# Altium PCB 如意硬件系统模块0831.PcbDoc (part 3 of 3)
Units mm, origin at the board's own origin, x right, y up, seen from the top; angles counter-clockwise.
Board outline 160 x 114.8 mm, 2 copper layers (Top Layer, Bottom Layer); 173 components, 141 nets, 673 pads, 206 vias.
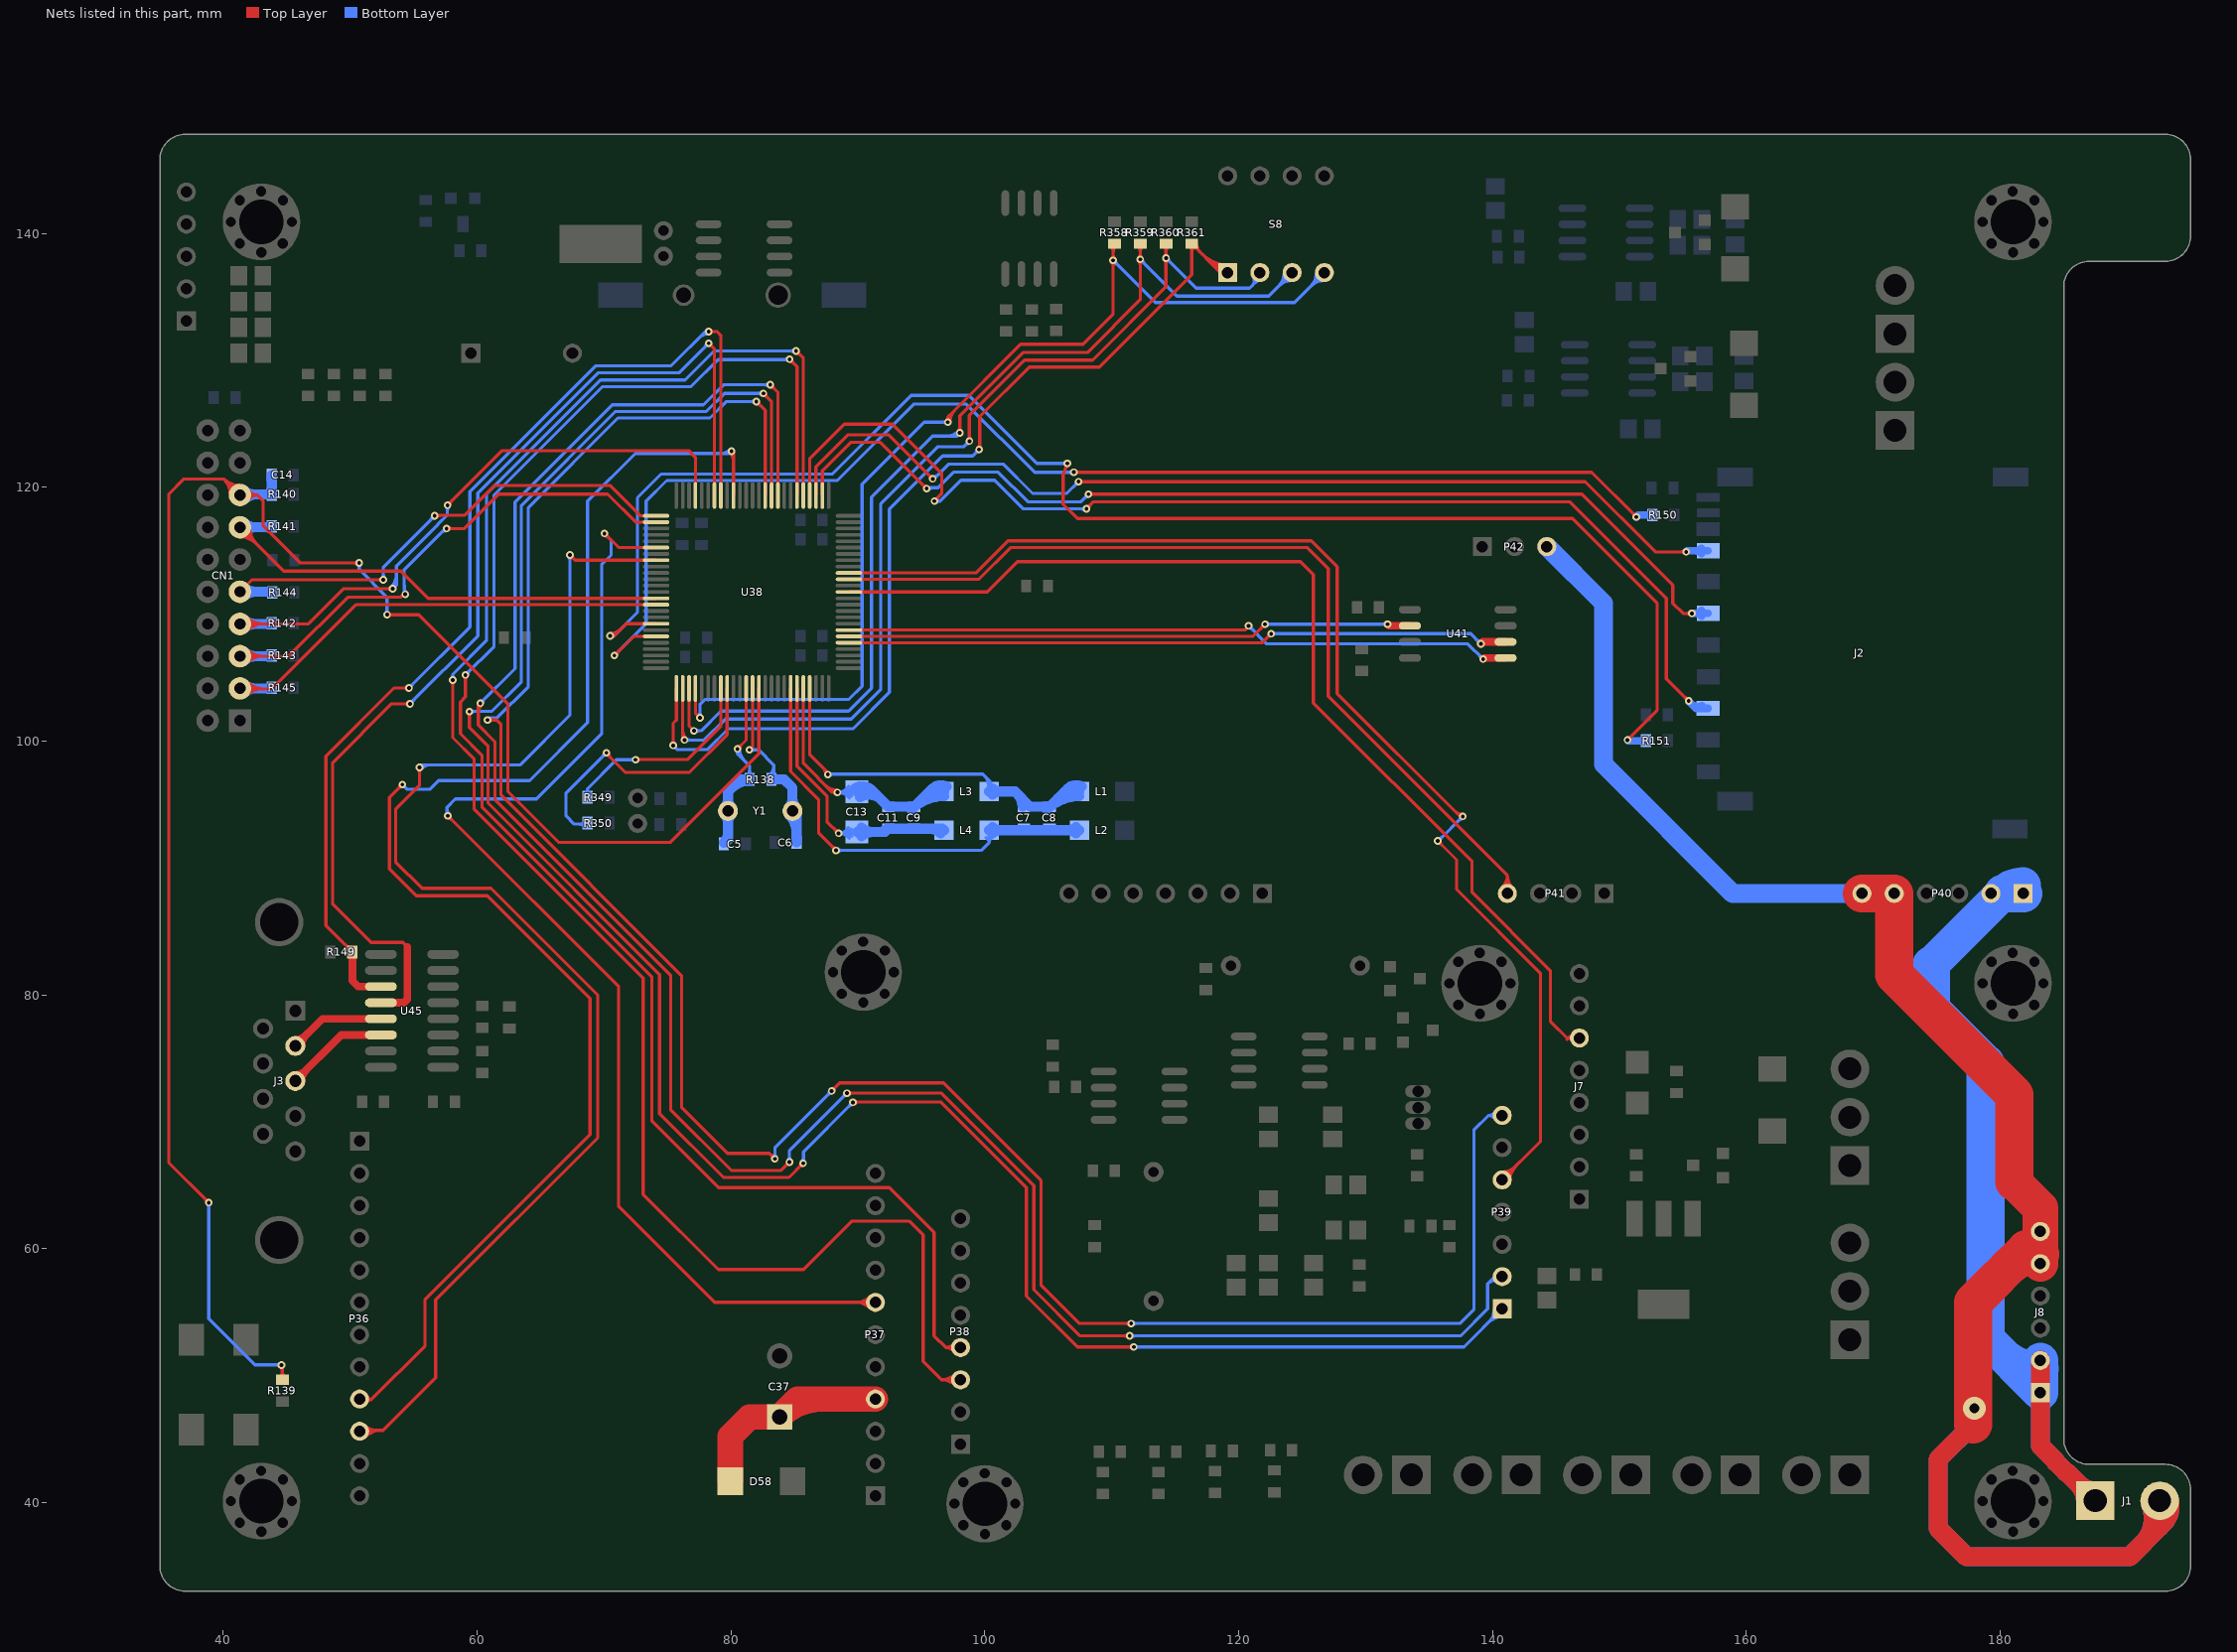
[diagram p3: the nets of this part, all layers, seen from the top]

## Via types
v1: diameter 0.6, hole 0.3, Top Layer to Bottom Layer, 151 vias
v2: diameter 0.8, hole 0.4, Top Layer to Bottom Layer, 35 vias
v3: diameter 1.27, hole 0.711, Top Layer to Bottom Layer, 15 vias
v4: diameter 1.8, hole 0.9, Top Layer to Bottom Layer, 2 vias
v5: diameter 1.8, hole 0.8, Top Layer to Bottom Layer, 1 vias
v6: diameter 1.66, hole 1.66, Top Layer to Bottom Layer, 1 vias
v7: diameter 1.18, hole 1.18, Top Layer to Bottom Layer, 1 vias

## Nets (pads, with @x,y where several pads share a name; then routed paths per layer and width w, separated by ;. In a path a pad name is that pad's centre, name@x,y a point inside that pad or via, vN(x,y) a via of type N, cw(c..) or ccw(c..) an arc to the next point about the centre after c; other vN are vias at no path point) (continued)
NRELOAD: P39.2 U38.59 | length 183.3
  Top Layer w0.254: 60.096,102.186 cw(c61.034,102.186) v1@60.371,102.849 ; v1(60.249,102.972) 60.096,102.819 60.096,101.244 61.392,99.949 61.392,95.402 75.235,81.559 75.235,70.942 80.018,66.159 83.934,66.159 v1(84.6,66.825) ; v1@83.083,127.894 cw(c83.083,127.476) 83.379,127.771 cw(c83.674,128.067) v1@83.256,128.067 ; v1(83.083,128.067) 83.692,127.458 U38.59@83.692,119.34 ; v1@84.427,66.825 cw(c84.009,66.825) 84.305,66.53 cw(c84.6,66.234) v1@84.6,66.652 ; v1(89.125,72.25) 96.584,72.25 103.861,64.973 103.861,56.769 107.505,53.125 v1(111.4,53.125) ; v1@89.247,72.128 cw(c89.543,71.832) 89.543,72.25 cw(c89.543,72.668) v1@89.247,72.372 ; v1@111.278,53.003 ccw(c110.982,52.707) 110.982,53.125 ccw(c110.982,53.543) v1@111.278,53.247
  Bottom Layer w0.254: v1(60.249,102.972) 62.975,105.698 62.975,118.83 70.637,126.492 77.826,126.492 79.4,128.067 v1(83.083,128.067) ; v1@60.249,103.145 ccw(c60.249,103.562) 60.544,103.267 ccw(c60.839,102.972) v1@60.422,102.972 ; v1@82.961,127.944 ccw(c82.666,127.649) 82.666,128.067 ccw(c82.666,128.484) v1@82.961,128.189 ; v1@84.478,66.947 ccw(c84.182,67.243) 84.6,67.243 ccw(c85.018,67.243) v1@84.722,66.947 ; v1(84.6,66.825) 84.6,67.725 v1(89.125,72.25) ; v1@88.952,72.25 cw(c88.534,72.25) 88.83,71.955 cw(c89.125,71.659) v1@89.125,72.077 ; v1(111.4,53.125) 137.475,53.125 139.6,55.25 139.6,57.225 140.171,57.796 P39.2@140.756,57.796 ; v1@111.522,53.003 cw(c111.818,52.707) 111.818,53.125 cw(c111.818,53.543) v1@111.522,53.247 ; 139.591,57.216 cw(c140.295,56.512) P39.2@140.631,57.449 ; 139.874,57.499 cw(c140.444,56.929) P39.2@140.717,57.688
NRESET: P39.1 U38.60 | length 183.9
  Top Layer w0.254: v1@59.263,102.189 cw(c58.968,101.894) 59.385,101.894 cw(c59.803,101.894) v1@59.508,102.189 ; v1(59.385,102.311) 59.385,101.067 60.858,99.593 60.858,95.098 74.371,81.585 74.371,70.637 79.4,65.609 84.559,65.609 v1(85.675,66.725) ; v1@82.55,127.208 cw(c82.55,126.79) 82.845,127.086 cw(c83.141,127.381) v1@82.723,127.381 ; v1(82.55,127.381) 83.192,126.739 U38.60@83.192,119.34 ; v1@85.502,66.725 cw(c85.084,66.725) 85.38,66.43 cw(c85.675,66.134) v1@85.675,66.552 ; v1(89.6,71.525) 89.625,71.55 96.547,71.55 103.276,64.821 103.276,56.261 107.287,52.25 v1(111.725,52.25) ; v1@89.722,71.403 cw(c90.078,71.047) 90.078,71.55 ; v1@89.722,71.647 ccw(c89.957,71.882) 89.957,71.55 ; v1@111.603,52.128 ccw(c111.307,51.832) 111.307,52.25 ccw(c111.307,52.668) v1@111.603,52.372
  Bottom Layer w0.254: v1(59.385,102.311) v1@59.436,102.311 ; v1@59.385,102.335 61.161,102.335 63.475,104.648 63.475,118.542 70.891,125.959 78.054,125.959 79.479,127.383 v1@82.548,127.383 ; v1@59.508,102.189 cw(c59.859,101.837) 59.859,102.335 ; v1@59.508,102.434 ccw(c59.746,102.672) 59.746,102.335 ; 82.128,127.383 cw(c82.128,126.959) v1@82.428,127.259 ; 82.137,127.383 ccw(c82.137,127.794) v1@82.428,127.503 ; v1@85.553,66.847 ccw(c85.197,67.203) 85.7,67.203 ; v1(85.675,66.725) 85.7,66.75 85.7,67.625 v1(89.6,71.525) ; 85.7,67.082 ccw(c86.032,67.082) v1@85.797,66.847 ; v1@89.427,71.525 cw(c89.009,71.525) 89.305,71.23 cw(c89.6,70.934) v1@89.6,71.352 ; v1(111.725,52.25) 137.75,52.25 P39.1@140.756,55.256 ; v1@111.847,52.128 cw(c112.143,51.832) 112.143,52.25 cw(c112.143,52.668) v1@111.847,52.372 ; P39.1@140.133,55.256 cw(c138.629,55.256) 139.692,54.192 cw(c140.756,53.129) P39.1@140.756,54.633 ; P39.1@140.387,55.256 cw(c139.496,55.256) 140.126,54.626 cw(c140.756,53.996) P39.1@140.756,54.887
OSC32_IN: R349.1 U38.8 | length 18.4
  Top Layer w0.254: v1@72.475,98.55 76.6,98.55 79.192,101.142 U38.8@79.192,104.14 ; v1@72.597,98.403 cw(c72.953,98.047) 72.953,98.55 ; v1@72.597,98.647 ccw(c72.832,98.882) 72.832,98.55
  Bottom Layer w0.254: R349.1@68.515,95.86 ccw(c68.18,96.225) 68.675,96.225 ; R349.1@68.64,95.625 R349.1@68.675,95.59 ; R349.1@68.704,95.561 R349.1@68.675,95.59 ; R349.1@68.857,95.888 cw(c69.078,96.225) 68.675,96.225 ; v1@72.353,98.403 ccw(c72.057,98.107) 72.057,98.525 ccw(c72.057,98.943) v1@72.353,98.647 ; v1(72.475,98.525) 70.975,98.525 68.675,96.225 ; R349.1@68.675,95.59 68.675,96.225
OSC32_OUT: R350.1 U38.9 | length 25.6
  Top Layer w0.254: v1@70.175,98.902 cw(c70.175,98.605) 70.385,98.815 ; v1@70.2,99 71.675,97.525 76.725,97.525 79.692,100.492 U38.9@79.692,104.14 ; v1@70.348,99.075 ccw(c70.886,99.075) 70.506,98.694
  Bottom Layer w0.254: 67.994,93.45 cw(c67.994,92.726) R350.1@68.506,93.238 ; 68.065,93.45 ccw(c68.065,94.075) R350.1@68.506,93.633 ; R350.1@68.704,93.529 68.625,93.45 67.65,93.45 67,94.1 67,95.9 v1(70.175,99.075) ; v1@70.002,99.075 cw(c69.584,99.075) 69.88,98.78 cw(c70.175,98.484) v1@70.175,98.902
OSCIN: C5.2 R138.2 U38.12 Y1.1 | length 23.7
  Top Layer w0.254: v1(80.5,99.375) 81.192,100.067 U38.12@81.192,104.14 ; v1@80.5,99.548 ccw(c80.5,99.966) 80.795,99.67 ccw(c81.091,99.375) v1@80.673,99.375
  Bottom Layer w0.254: v1@80.419,99.375 ccw(c81.129,99.375) 80.627,98.873 ; v1(80.5,99.375) 80.5,99 81.461,98.039 R138.2@81.461,96.971 ; v1@80.673,99.375 ccw(c81.996,99.375) 81.06,98.44 ; R138.2@81.263,97.262 ccw(c80.786,97.739) 81.461,97.739 ccw(c82.136,97.739) R138.2@81.659,97.262
  Bottom Layer w0.8: C5.2@79.424,91.989 ccw(c78.624,92.79) 79.756,92.79 ; Y1.1@79.482,94.214 cw(c78.821,93.553) 79.756,93.553 cw(c80.691,93.553) Y1.1@80.03,94.214 ; Y1.1@79.482,94.762 ccw(c78.821,95.423) 79.756,95.423 ccw(c80.691,95.423) Y1.1@80.03,94.762 ; C5.2@79.756,92.218 Y1.1@79.756,94.488 79.756,96.006 80.721,96.971 R138.2@81.461,96.971 ; 80.027,96.277 cw(c81.461,94.843) R138.2@81.461,96.871 ; 80.351,96.601 cw(c81.265,95.687) R138.2@81.46,96.965
OSCOUT: C6.2 R138.1 U38.13 Y1.2 | length 20.1
  Top Layer w0.254: v1(81.45,99.3) 81.692,99.542 U38.13@81.692,104.14
  Bottom Layer w0.254: v1(81.45,99.3) 82.175,99.3 83.375,98.1 ; v1@81.572,99.178 cw(c81.868,98.882) 81.868,99.3 cw(c81.868,99.718) v1@81.572,99.422 ; R138.1@83.003,97.274 ccw(c82.272,98.1) 83.375,98.1 ; R138.1@83.171,97.084 ccw(c82.771,97.536) 83.375,97.536 ; R138.1@83.188,96.971 83.375,97.158 83.375,98.1
  Bottom Layer w0.8: R138.1@83.188,96.971 84.179,96.971 84.836,96.314 Y1.2@84.836,94.488 85.163,94.161 C6.2@85.163,92.005 ; Y1.2@84.562,94.214 cw(c83.111,92.763) 85.163,92.763 ; Y1.2@84.562,94.762 ccw(c83.901,95.423) 84.836,95.423 ccw(c85.771,95.423) Y1.2@85.11,94.762
PWR_SW: P39.7 U38.61 | length 190.2
  Top Layer w0.254: v1(60.808,101.651) 61.519,101.651 61.874,101.295 61.874,95.733 76.098,81.509 76.098,71.145 79.731,67.513 83.012,67.513 v1(83.45,67.075) ; v1@60.93,101.528 cw(c61.225,101.233) 61.225,101.651 cw(c61.225,102.068) v1@60.93,101.773 ; v1@81.991,126.573 cw(c81.991,126.155) 82.287,126.451 cw(c82.582,126.746) v1@82.164,126.746 ; v1(81.991,126.746) 82.692,126.045 U38.61@82.692,119.34 ; v1@83.277,67.075 ccw(c82.859,67.075) 83.155,67.37 ccw(c83.45,67.666) v1@83.45,67.248 ; v1(87.925,72.425) 88.55,73.05 96.749,73.05 104.419,65.38 104.419,57.125 107.444,54.1 v1(111.525,54.1) ; v1@87.925,72.598 ccw(c87.925,73.016) 88.22,72.72 ccw(c88.516,72.425) v1@88.098,72.425 ; v1@111.403,53.978 ccw(c111.107,53.682) 111.107,54.1 ccw(c111.107,54.518) v1@111.403,54.222
  Bottom Layer w0.254: v1@60.935,101.534 cw(c61.544,100.98) 61.544,101.803 ; v1@60.96,101.803 61.544,101.803 ; v1@81.869,126.624 ccw(c81.574,126.328) 81.574,126.746 ccw(c81.574,127.164) v1@81.869,126.868 ; v1(81.991,126.746) 79.629,126.746 78.334,125.451 71.095,125.451 64.025,118.381 64.025,104.284 61.544,101.803 ; v1@83.328,67.197 ccw(c83.032,67.493) 83.45,67.493 ccw(c83.868,67.493) v1@83.572,67.197 ; v1(83.45,67.075) 83.45,67.95 v1(87.925,72.425) ; v1@87.752,72.425 cw(c87.334,72.425) 87.63,72.13 cw(c87.925,71.834) v1@87.925,72.252 ; v1(111.525,54.1) 137.425,54.1 138.525,55.2 138.525,69.35 139.671,70.496 ; v1@111.647,53.978 cw(c111.943,53.682) 111.943,54.1 cw(c111.943,54.518) v1@111.647,54.222 ; P39.7@140.129,70.496 P39.7@140.756,70.496 139.671,70.496 ; P39.7@140.218,70.182 ccw(c139.671,69.863) 139.671,70.496 ; P39.7@140.218,70.81 cw(c139.671,71.129) 139.671,70.496
RELAY1: P41.4 U38.40 | length 74.4
  Top Layer w0.254: U38.40@89.292,112.74 99.507,112.74 102.006,115.24 125.4,115.24 127.05,113.59 127.05,103.531 141.16,89.421 ; P41.4@140.734,88.439 ccw(c139.814,89.421) 141.16,89.421 ; P41.4@140.908,88.253 ccw(c140.363,88.835) 141.16,88.835 ccw(c141.957,88.835) P41.4@141.412,88.253 ; P41.4@141.16,87.984 141.16,89.421 ; P41.4@141.586,88.439 cw(c142.506,89.421) 141.16,89.421
RELOAD: P37.7 U38.81 | length 102.1
  Top Layer w0.254: v1@57.683,93.934 cw(c57.683,93.516) 57.979,93.812 cw(c58.274,94.107) v1@57.856,94.107 ; v1(57.683,94.107) 71.145,80.645 71.145,63.322 78.704,55.764 P37.7@91.376,55.764 ; v1@70.025,116.177 cw(c70.025,115.735) 70.338,116.047 ; v1(70.025,116.35) 70.035,116.35 71.136,115.249 71.323,115.249 U38.81@74.092,115.24 ; v1@70.198,116.35 ccw(c70.591,116.35) 70.313,116.072 ; P37.7@90.935,55.323 ccw(c89.872,54.26) 89.872,55.764 ccw(c89.872,57.268) P37.7@90.935,56.205 ; P37.7@91.115,55.503 ccw(c90.485,54.873) 90.485,55.764 ccw(c90.485,56.655) P37.7@91.115,56.025
  Bottom Layer w0.254: v1@57.607,94.107 57.607,94.767 58.268,95.428 64.668,95.428 69.8,100.559 69.8,113.9 70.55,114.65 70.55,115.825 v1(70.025,116.35) ; 57.607,94.709 ccw(c58.285,94.709) v1@57.806,94.229 ; v1@70.025,116.177 cw(c70.025,115.759) 70.32,116.055 cw(c70.616,116.35) v1@70.198,116.35
RESET: C14.1 CN1.15 R139.1 R140.1 U38.14 | length 167.5
  Top Layer w0.254: v1@38.677,63.625 ccw(c38.259,63.625) 38.555,63.92 ccw(c38.85,64.216) v1@38.85,63.798 ; v1(38.85,63.625) 35.7,66.775 35.7,119.45 36.9,120.65 40.036,120.65 ; CN1.15@40.544,119.393 ccw(c38.809,119.423) 40.036,120.65 ; CN1.15@40.798,119.389 ccw(c39.641,119.409) 40.459,120.227 ccw(c41.277,121.045) CN1.15@41.297,119.888 ; CN1.15@41.293,120.142 cw(c41.263,121.877) 40.036,120.65 ; CN1.15@41.734,119.107 cw(c42.232,118.79) 42.232,119.38 cw(c42.232,119.97) CN1.15@41.734,119.653 ; CN1.15@41.949,118.971 cw(c42.695,118.495) 42.695,119.38 ; CN1.15@41.949,119.789 ccw(c42.695,120.265) 42.695,119.38 ; R139.1@44.449,49.858 ccw(c43.972,50.335) 44.647,50.335 ccw(c45.322,50.335) R139.1@44.845,49.858 ; v1@44.453,50.703 cw(c43.984,50.234) 44.647,50.234 ; v1(44.575,50.825) 44.647,50.753 R139.1@44.647,49.66 ; v1@50.578,113.903 ccw(c50.282,113.607) 50.282,114.025 ccw(c50.282,114.443) v1@50.578,114.147 ; v1(50.7,114.025) 46.075,114.025 43.125,116.975 43.125,118.95 42.695,119.38 ; v1(52.9,109.95) 55.404,109.95 62.408,102.946 62.408,96.037 66.445,92 75.2,92 82.192,98.992 U38.14@82.192,104.14 ; v1@53.022,109.828 cw(c53.318,109.532) 53.318,109.95 cw(c53.318,110.368) v1@53.022,110.072 ; 40.036,120.65 CN1.15@41.306,119.38 42.695,119.38
  Bottom Layer w0.254: v1@38.728,63.503 cw(c38.432,63.207) 38.85,63.207 cw(c39.268,63.207) v1@38.972,63.503 ; v1(38.85,63.625) 38.85,54.475 42.475,50.85 44.55,50.85 v1(44.575,50.825) ; 44.097,50.85 cw(c44.097,50.347) v1@44.453,50.703 ; 44.218,50.85 ccw(c44.218,51.182) v1@44.453,50.947 ; v1@50.578,113.903 cw(c50.282,113.607) 50.7,113.607 cw(c51.118,113.607) v1@50.822,113.903 ; v1(50.7,114.025) 50.7,113.525 52.9,111.325 v1(52.9,109.95) ; v1@52.778,110.072 ccw(c52.482,110.368) 52.9,110.368 ccw(c53.318,110.368) v1@53.022,110.072
  Bottom Layer w0.8: CN1.15@41.363,119.437 R140.1@43.812,119.437 C14.1@43.812,120.961 ; CN1.15@41.652,119.034 cw(c42.624,118.062) 42.624,119.437 ; CN1.15@41.652,119.726 ccw(c42.349,120.423) 42.349,119.437
RXD1: J3.2 U45.13 | length 9.5
  Top Layer w0.6: J3.2@45.67,75.971 47.804,78.105 U45.13@52.414,78.105 ; J3.2@45.67,76.459 ccw(c45.67,77.635) 46.502,76.803 ccw(c47.334,75.971) J3.2@46.157,75.971
SD_CD: R150.2 U38.95 | length 107
  Top Layer w0.254: v1(70.803,106.73) 72.313,108.24 U38.95@74.092,108.24 ; v1@70.803,106.903 ccw(c70.803,107.321) 71.099,107.026 ccw(c71.394,106.73) v1@70.976,106.73 ; v1(106.999,121.176) 147.799,121.176 v1(151.325,117.65) ; v1@107.121,121.054 cw(c107.417,120.758) 107.417,121.176 cw(c107.417,121.594) v1@107.121,121.298 ; v1@151.152,117.65 ccw(c150.734,117.65) 151.03,117.945 ccw(c151.325,118.241) v1@151.325,117.823
  Bottom Layer w0.254: v1(70.803,106.73) 73.304,109.231 73.304,118.897 74.93,120.523 88.367,120.523 94.386,126.543 98.552,126.543 103.919,121.176 v1(106.999,121.176) v1(106.999,121.176) ; v1@70.803,106.903 ccw(c70.803,107.321) 71.099,107.026 ccw(c71.394,106.73) v1@70.976,106.73 ; v1@106.877,121.054 ccw(c106.581,120.758) 106.581,121.176 ccw(c106.581,121.594) v1@106.877,121.298
  Bottom Layer w0.6: 151.685,117.799 ccw(c151.685,117.29) v1(151.325,117.65) 151.474,117.799 R150.2@152.581,117.799
SD_CS: R151.2 U38.93 | length 126.5
  Top Layer w0.254: v1@70.475,108.194 ccw(c70.475,108.723) 70.849,108.349 ; v1(70.475,108.275) 70.775,108.275 71.74,109.24 U38.93@74.092,109.24 ; v1@70.475,108.448 ccw(c70.475,109.59) 71.282,108.782 ; v1@106.342,121.804 cw(c105.961,121.634) 106.351,121.485 cw(c106.741,121.336) v1@106.571,121.717 ; v1(106.5,121.875) 106.17,121.012 106.17,118.646 107.29,117.526 146.304,117.526 152.959,110.871 152.959,102.409 v1(150.625,100.075) ; v1@150.625,100.248 ccw(c150.625,100.666) 150.92,100.37 ccw(c151.216,100.075) v1@150.798,100.075
  Bottom Layer w0.254: v1@70.475,108.194 ccw(c70.475,108.723) 70.849,108.349 ; v1(70.475,108.275) 70.775,108.275 72.625,110.125 72.625,119.158 74.498,121.031 87.986,121.031 94.183,127.229 98.73,127.229 104.083,121.875 v1(106.5,121.875) ; v1@70.475,108.448 ccw(c70.475,109.59) 71.282,108.782 ; v1@106.378,121.753 ccw(c106.082,121.457) 106.082,121.875 ccw(c106.082,122.293) v1@106.378,121.997
  Bottom Layer w0.6: v1(150.625,100.075) 150.681,100.019 R151.2@152.073,100.019
SHUT: P36.10 U38.83 | length 111
  Top Layer w0.254: P36.10@50.736,45.604 50.807,45.675 52.575,45.675 56.73,49.83 56.73,55.968 69.494,68.732 69.494,79.985 61.087,88.392 55.651,88.392 53.569,90.475 53.569,94.615 55.448,96.495 v1(55.448,97.917) ; P36.10@50.997,45.343 cw(c51.798,44.542) 51.798,45.675 ; P36.10@51.177,45.163 cw(c52.411,43.929) 52.411,45.675 ; P36.10@51.177,46.045 ccw(c52.069,46.937) 52.069,45.675 ; v1@55.326,97.795 cw(c55.031,97.499) 55.448,97.499 cw(c55.866,97.499) v1@55.571,97.795 ; v1@67.3,114.477 cw(c67.3,114.059) 67.595,114.355 cw(c67.891,114.65) v1@67.473,114.65 ; v1(67.3,114.65) 67.71,114.24 U38.83@74.092,114.24
  Bottom Layer w0.254: v1@55.391,97.974 cw(c55.743,97.622) 55.743,98.12 ; v1@55.571,97.795 cw(c56.356,97.009) 56.356,98.12 ; v1@55.651,98.12 63.398,98.12 67.3,102.022 v1(67.3,114.65) ; v1@67.178,114.528 cw(c66.882,114.232) 67.3,114.232 cw(c67.718,114.232) v1@67.422,114.528
SPI1_MISO: U38.31 U41.2 | length 46.9
  Top Layer w0.254: U38.31@89.292,108.24 121.115,108.24 v1(122.075,109.2) ; v1@121.902,109.2 cw(c121.484,109.2) 121.78,108.905 cw(c122.075,108.609) v1@122.075,109.027
  Top Layer w0.6: 132.024,109.076 cw(c132.024,109.499) v1(131.725,109.2) 131.849,109.076 U41.2@133.483,109.076
  Bottom Layer w0.254: v1(122.075,109.2) v1(131.725,109.2) ; v1@122.197,109.078 cw(c122.493,108.782) 122.493,109.2 cw(c122.493,109.618) v1@122.197,109.322 ; v1@131.603,109.078 ccw(c131.307,108.782) 131.307,109.2 ccw(c131.307,109.618) v1@131.603,109.322
SPI1_MOSI: U38.32 U41.5 | length 54.3
  Top Layer w0.254: U38.32@89.292,108.74 120.49,108.74 120.775,109.025 v1(120.775,109.075)
  Top Layer w0.6: v1(139.25,106.45) 139.336,106.536 U41.5@141.019,106.536
  Bottom Layer w0.254: v1@120.775,108.902 cw(c120.775,108.484) 121.07,108.78 cw(c121.366,109.075) v1@120.948,109.075 ; v1(120.775,109.075) 122.2,107.65 138.05,107.65 v1(139.25,106.45) ; v1@139.077,106.45 ccw(c138.659,106.45) 138.955,106.745 ccw(c139.25,107.041) v1@139.25,106.623
SPI1_SCK: U38.30 U41.6 | length 54.8
  Top Layer w0.254: U38.30@89.292,107.74 121.84,107.74 v1(122.55,108.45) ; v1@122.377,108.45 cw(c121.959,108.45) 122.255,108.155 cw(c122.55,107.859) v1@122.55,108.277
  Top Layer w0.6: 139.452,107.806 ccw(c139.452,107.273) v1(139.075,107.65) 139.231,107.806 U41.6@141.019,107.806
  Bottom Layer w0.254: v1(122.55,108.45) 138.275,108.45 v1(139.075,107.65) ; v1@122.672,108.328 cw(c122.968,108.032) 122.968,108.45 cw(c122.968,108.868) v1@122.672,108.572 ; v1@138.902,107.65 ccw(c138.484,107.65) 138.78,107.945 ccw(c139.075,108.241) v1@139.075,107.823
SPI2_MISO: J2.7 U38.53 | length 83.6
  Top Layer w0.254: U38.53@86.692,119.34 86.692,121.603 89.214,124.125 92.41,124.125 v1(95.885,120.65) ; v1@95.712,120.65 ccw(c95.294,120.65) 95.59,120.945 ccw(c95.885,121.241) v1@95.885,120.823 ; v1(107.379,120.434) 147.291,120.434 152.825,114.9 v1(155.25,114.9) v1@155.3,114.85 ; v1@107.501,120.312 cw(c107.796,120.016) 107.796,120.434 cw(c107.796,120.852) v1@107.501,120.556 ; v1@155.128,114.778 ccw(c154.832,114.482) 154.832,114.9 ccw(c154.832,115.318) v1@155.128,115.022
  Bottom Layer w0.254: v1(95.885,120.65) 96,120.65 97.168,121.818 101.448,121.818 103.759,119.507 106.451,119.507 v1(107.379,120.434) ; v1@95.885,120.823 ccw(c95.885,121.518) 96.377,121.027 ; v1@107.206,120.434 cw(c106.788,120.434) 107.083,120.139 cw(c107.379,119.843) v1@107.379,120.261
  Bottom Layer w0.6: v1(155.25,114.9) 155.334,114.984 J2.7@156.981,114.984 ; J2.7@156.469,114.772 ccw(c155.957,114.26) 155.957,114.984 ccw(c155.957,115.708) J2.7@156.469,115.196
SPI2_MOSI: J2.2 U38.54 | length 95.8
  Top Layer w0.254: U38.54@86.192,119.34 86.192,122.235 88.925,124.968 92.71,124.968 96.596,121.082 96.596,119.471 v1(96.025,118.9) ; v1@96.025,119.073 ccw(c96.025,119.491) 96.32,119.195 ccw(c96.616,118.9) v1@96.198,118.9 ; v1(108.001,118.288) 108.563,118.85 146.075,118.85 153.695,111.23 153.695,104.905 v1(155.45,103.15) ; v1@108.001,118.461 ccw(c108.001,118.878) 108.296,118.583 ccw(c108.591,118.288) v1@108.174,118.288 ; v1@155.277,103.15 ccw(c154.859,103.15) 155.155,103.445 ccw(c155.45,103.741) v1@155.45,103.323
  Bottom Layer w0.254: v1(96.025,118.9) 96.472,118.9 98.12,120.548 100.762,120.548 103.022,118.288 v1(108.001,118.288) ; v1@96.147,118.778 cw(c96.443,118.482) 96.443,118.9 cw(c96.443,119.318) v1@96.147,119.022 ; v1@107.878,118.165 ccw(c107.583,117.87) 107.583,118.288 ccw(c107.583,118.705) v1@107.878,118.41
  Bottom Layer w0.6: v1(155.45,103.15) 156.035,102.565 J2.2@156.972,102.565 ; 155.769,102.831 ccw(c156.144,103.207) J2.2@156.481,102.797
SPI2_SCK: J2.5 U38.52 | length 84.9
  Top Layer w0.254: U38.52@87.192,119.34 87.192,121.292 89.425,123.525 91.765,123.525 v1(95.402,119.888) ; v1@95.229,119.888 ccw(c94.812,119.888) 95.107,120.183 ccw(c95.402,120.479) v1@95.402,120.061 ; v1(108.153,119.45) 147.025,119.45 154.2,112.275 154.2,110.85 155,110.05 v1(155.7,110.05) ; v1@108.276,119.328 cw(c108.571,119.032) 108.571,119.45 cw(c108.571,119.868) v1@108.276,119.572 ; v1@155.578,109.928 ccw(c155.282,109.632) 155.282,110.05 ccw(c155.282,110.468) v1@155.578,110.172
  Bottom Layer w0.254: v1(95.402,119.888) 95.471,119.956 96.309,119.956 97.536,121.183 101.041,121.183 103.378,118.847 107.575,118.847 v1@108.153,119.425 ; v1@95.525,119.766 cw(c95.985,119.306) 95.985,119.956 ; 107.84,119.112 ccw(c107.502,119.45) v1@107.98,119.45 ; 107.901,119.172 cw(c108.153,118.92) v1@108.153,119.277
  Bottom Layer w0.6: v1(155.7,110.05) 155.709,110.059 J2.5@156.981,110.059 ; J2.5@156.469,109.847 ccw(c155.957,109.335) 155.957,110.059 ccw(c155.957,110.783) J2.5@156.469,110.271
SW1: R361.1 S8.1 U38.1 | length 86.4
  Top Layer w0.254: v1@75.316,99.767 ccw(c75.02,100.062) 75.438,100.062 ccw(c75.856,100.062) v1@75.56,99.767 ; v1(75.438,99.644) 75.438,101.397 75.692,101.651 U38.1@75.692,104.14 ; v1@99.42,123.084 ccw(c99.002,123.502) 99.593,123.502 ; v1(99.543,122.961) 99.593,123.012 99.593,125.568 103.489,129.464 109.017,129.464 116.301,136.748 R361.1@116.301,139.182 118.577,136.906 S8.1@119.126,136.906 ; R361.1@116.103,138.984 cw(c115.626,138.507) 116.301,138.507 cw(c116.976,138.507) R361.1@116.499,138.984 ; R361.1@116.395,138.902 cw(c116.395,138.454) 116.712,138.771 ; R361.1@116.674,139.182 ccw(c117.574,139.182) 116.938,138.545 ; 117.125,138.358 ccw(c119.126,140.359) S8.1@119.126,137.529 ; 117.559,137.924 ccw(c119.126,139.492) S8.1@119.126,137.275 ; 117.992,137.491 ccw(c119.126,138.625) S8.1@119.126,137.021
  Bottom Layer w0.254: v1(75.438,99.644) 75.768,99.314 78.13,99.314 79.781,100.965 89.611,100.965 92.481,103.835 92.481,118.26 96.675,122.453 99.035,122.453 v1(99.543,122.961) ; v1@99.37,122.961 cw(c98.952,122.961) 99.247,122.666 cw(c99.543,122.371) v1@99.543,122.788
SW2: R360.1 S8.2 U38.2 | length 86.5
  Top Layer w0.254: v1@76.192,100.211 U38.2@76.192,104.14 ; 76.192,100.82 ccw(c77.071,100.82) v1@76.449,100.198 ; v1@98.658,123.744 ccw(c98.363,124.039) 98.781,124.039 ccw(c99.198,124.039) v1@98.903,123.744 ; v1(98.781,123.622) 98.781,125.656 103.129,130.004 108.49,130.004 114.269,135.783 v1(114.269,138.05) R360.1@114.269,139.182 ; R360.1@114.071,138.984 cw(c113.594,138.507) 114.269,138.507 cw(c114.944,138.507) R360.1@114.467,138.984 ; v1@114.147,137.928 cw(c113.851,137.632) 114.269,137.632 cw(c114.687,137.632) v1@114.391,137.928 ; v1@114.147,138.172 ccw(c113.851,138.468) 114.269,138.468 ccw(c114.687,138.468) v1@114.391,138.172
  Bottom Layer w0.254: v1(76.327,100.076) 77.902,100.076 79.553,101.727 89.459,101.727 91.796,104.064 91.796,118.694 96.291,123.19 98.349,123.19 v1(98.781,123.622) ; v1@76.403,100.127 v1@76.403,100.178 ; v1@76.449,99.954 cw(c76.745,99.658) 76.745,100.076 cw(c76.745,100.494) v1@76.449,100.198 ; v1@98.608,123.622 cw(c98.19,123.622) 98.485,123.326 cw(c98.781,123.031) v1@98.781,123.449 ; v1@114.269,137.877 cw(c114.269,137.459) 114.564,137.755 cw(c114.86,138.05) v1@114.442,138.05 ; v1(114.269,138.05) 116.644,135.675 120.85,135.675 121.666,136.491 S8.2@121.666,136.906 ; 121.058,135.883 ccw(c120.66,136.28) S8.2@121.137,136.577 ; 121.284,136.109 ccw(c120.939,136.453) S8.2@121.353,136.711 ; 121.311,136.136 cw(c121.666,135.781) S8.2@121.666,136.283
SW3: R359.1 S8.3 U38.3 | length 90.3
  Top Layer w0.254: U38.3@76.692,104.14 76.692,101.183 v1(77.075,100.8) ; v1@97.896,124.405 ccw(c97.601,124.7) 98.019,124.7 ccw(c98.436,124.7) v1@98.141,124.405 ; v1(98.019,124.282) 98.019,125.619 103.007,130.607 108.077,130.607 112.237,134.767 v1(112.237,137.95) R359.1@112.237,139.182 ; R359.1@112.039,138.984 cw(c111.562,138.507) 112.237,138.507 cw(c112.912,138.507) R359.1@112.435,138.984 ; v1@112.115,137.828 cw(c111.819,137.532) 112.237,137.532 cw(c112.655,137.532) v1@112.359,137.828 ; v1@112.115,138.072 ccw(c111.819,138.368) 112.237,138.368 ccw(c112.655,138.368) v1@112.359,138.072
  Bottom Layer w0.254: v1(77.075,100.8) 77.635,100.8 79.197,102.362 89.256,102.362 91.059,104.165 91.059,119.202 95.885,124.028 97.79,124.028 v1@98.044,124.282 ; v1@77.197,100.678 cw(c77.493,100.382) 77.493,100.8 cw(c77.493,101.218) v1@77.197,100.922 ; 96.988,124.028 ccw(c96.988,125.313) v1@97.896,124.405 ; 97.601,124.028 ccw(c97.601,124.7) v1@98.076,124.225 ; v1@112.237,137.777 cw(c112.237,137.359) 112.532,137.655 cw(c112.828,137.95) v1@112.41,137.95 ; v1(112.237,137.95) 115.137,135.05 122.35,135.05 S8.3@124.206,136.906 ; S8.3@123.583,136.906 cw(c122.079,136.906) 123.142,135.842 cw(c124.206,134.779) S8.3@124.206,136.283 ; S8.3@123.837,136.906 cw(c122.946,136.906) 123.576,136.276 cw(c124.206,135.646) S8.3@124.206,136.537
SW4: R358.1 S8.4 U38.4 | length 93.4
  Top Layer w0.254: U38.4@77.192,104.14 77.192,102.183 v1(77.546,101.829) ; v1@96.958,125.245 ccw(c96.683,125.529) 97.079,125.529 ; v1@96.998,125.12 cw(c97.788,125.12) 97.229,125.679 ; v1(97.079,125.12) 97.079,125.529 ; v1@97.199,125.245 cw(c97.474,125.529) 97.079,125.529 ; v1@97.252,125.12 cw(c98.655,125.12) 97.663,126.113 ; R358.1@109.914,138.984 cw(c109.464,138.535) 110.1,138.535 ; v1@109.978,137.753 cw(c109.682,137.457) 110.1,137.457 cw(c110.518,137.457) v1@110.222,137.753 ; v1@109.978,137.997 ccw(c109.682,138.293) 110.1,138.293 ccw(c110.518,138.293) v1@110.222,137.997 ; 110.1,138.48 cw(c110.813,138.48) R358.1@110.309,138.984 ; R358.1@110.205,139.182 110.1,139.077 v1(110.1,137.875) 110.1,133.646 107.721,131.267 102.817,131.267 97.079,125.529
  Bottom Layer w0.254: v1@77.424,101.951 ccw(c77.129,102.246) 77.546,102.246 ccw(c77.964,102.246) v1@77.669,101.951 ; v1@77.546,101.854 77.546,102.871 77.95,103.275 89.275,103.275 90.325,104.325 90.325,120.221 95.225,125.12 v1(97.079,125.12) ; v1@96.956,124.998 ccw(c96.661,124.703) 96.661,125.12 ccw(c96.661,125.538) v1@96.956,125.243 ; v1@110.1,137.702 cw(c110.1,137.284) 110.395,137.58 cw(c110.691,137.875) v1@110.273,137.875 ; v1(110.1,137.875) 113.425,134.55 124.39,134.55 S8.4@126.746,136.906 ; S8.4@126.123,136.906 cw(c124.619,136.906) 125.682,135.842 cw(c126.746,134.779) S8.4@126.746,136.283 ; S8.4@126.377,136.906 cw(c125.486,136.906) 126.116,136.276 cw(c126.746,135.646) S8.4@126.746,136.537
SYSLED: J7.6 U38.38 | length 86.5
  Top Layer w0.254: U38.38@89.292,111.74 100.183,111.74 102.568,114.125 124.864,114.125 125.882,113.106 125.882,102.997 138.379,90.5 138.379,88.062 144.55,81.891 144.55,77.925 145.925,76.55 145.967,76.592 ; 145.865,76.49 cw(c146.32,76.036) J7.6@146.756,76.508 ; 146.052,76.677 cw(c146.499,76.23) J7.6@146.928,76.694 ; J7.6@146.244,76.393 ccw(c145.967,76.3) 145.967,76.592 ; J7.6@146.244,76.791 cw(c145.967,76.884) 145.967,76.592 ; J7.6@146.834,76.592 145.967,76.592
TCK/SWCLK: CN1.9 R144.2 U38.76 | length 44.5
  Top Layer w0.254: CN1.9@41.306,111.76 42.246,112.7 v1(52.603,112.7) ; v1@52.481,112.577 ccw(c52.186,112.282) 52.186,112.7 ccw(c52.186,113.117) v1@52.481,112.822 ; v1@56.65,117.7 56.729,117.779 58.979,117.779 61.325,120.125 70.5,120.125 72.885,117.74 U38.76@74.092,117.74 ; v1@56.772,117.618 cw(c57.162,117.228) 57.162,117.779 ; v1@56.772,117.862 ccw(c56.974,118.064) 56.974,117.779
  Bottom Layer w0.254: v1@52.481,112.822 ccw(c52.186,113.117) 52.603,113.117 ccw(c53.021,113.117) v1@52.726,112.822 ; v1@52.603,112.979 52.603,113.693 v1(56.65,117.74) ; v1@56.477,117.74 cw(c56.059,117.74) 56.355,117.445 cw(c56.65,117.149) v1@56.65,117.567
  Bottom Layer w0.8: CN1.9@41.306,111.76 R144.2@43.812,111.76 ; CN1.9@41.652,111.414 cw(c42.487,110.579) 42.487,111.76 cw(c42.487,112.941) CN1.9@41.652,112.106
TDI: CN1.5 R143.1 U38.77 | length 50.9
  Top Layer w0.254: CN1.5@41.306,106.68 45.138,106.68 49.786,111.328 53.953,111.328 54.25,111.625 54.318,111.557 v1(54.331,111.557) ; CN1.5@41.665,106.321 cw(c42.532,105.454) 42.532,106.68 cw(c42.532,107.906) CN1.5@41.665,107.039 ; CN1.5@41.845,106.141 cw(c43.146,104.84) 43.146,106.68 cw(c43.146,108.52) CN1.5@41.845,107.219 ; v1(57.582,116.738) 58.988,116.738 61.7,119.45 70.275,119.45 72.485,117.24 U38.77@74.092,117.24 ; v1@57.704,116.616 cw(c57.999,116.321) 57.999,116.738 cw(c57.999,117.156) v1@57.704,116.861
  Bottom Layer w0.254: 54.252,112.164 ccw(c54.938,112.164) v1@54.453,111.679 ; v1(54.331,111.557) 54.318,111.557 54.25,111.625 54.25,111.738 54.252,111.74 54.252,112.26 54.25,112.262 54.25,113.508 v1@57.35,116.608 ; 57.113,116.371 cw(c57.582,115.902) v1@57.582,116.565
  Bottom Layer w0.8: CN1.5@41.306,106.68 R143.1@43.755,106.68 ; CN1.5@41.652,106.334 cw(c42.487,105.499) 42.487,106.68 cw(c42.487,107.861) CN1.5@41.652,107.026
TDO/SWO: CN1.13 R141.1 U38.89 | length 44.2
  Top Layer w0.254: CN1.13@41.306,116.078 cw(c41.306,114.238) 42.607,115.539 cw(c43.908,116.84) CN1.13@42.068,116.84 ; CN1.13@41.306,116.332 cw(c41.306,115.106) 42.173,115.973 cw(c43.04,116.84) CN1.13@41.814,116.84 ; CN1.13@41.306,116.84 44.76,113.386 53.979,113.386 56.125,111.24 U38.89@74.092,111.24
  Bottom Layer w0.8: CN1.13@41.306,116.84 R141.1@43.755,116.84 ; CN1.13@41.652,116.494 cw(c42.487,115.659) 42.487,116.84 cw(c42.487,118.021) CN1.13@41.652,117.186
TMS/SWDIO: CN1.7 R142.1 U38.72 | length 58.9
  Top Layer w0.254: CN1.7@41.306,109.22 41.311,109.225 46.7,109.225 49.475,112 v1(53.34,112) ; CN1.7@41.665,108.861 cw(c42.544,107.982) 42.544,109.225 ; CN1.7@41.665,109.579 ccw(c42.52,110.434) 42.52,109.225 ; CN1.7@41.845,108.681 cw(c43.158,107.368) 43.158,109.225 ; CN1.7@41.845,109.759 ccw(c43.134,111.048) 43.134,109.225 ; v1@53.218,111.878 ccw(c52.922,111.582) 52.922,112 ccw(c52.922,112.418) v1@53.218,112.122 ; v1(57.658,118.575) 61.958,122.875 76.675,122.875 77.192,122.358 U38.72@77.192,119.34 ; v1@57.658,118.748 ccw(c57.658,119.166) 57.953,118.87 ccw(c58.249,118.575) v1@57.831,118.575
  Bottom Layer w0.254: v1@53.218,112.122 ccw(c52.234,113.106) 53.625,113.106 ; v1(53.34,112) 53.625,112.285 53.625,113.767 56.873,117.015 ; v1@53.397,111.943 ccw(c52.847,112.493) 53.625,112.493 ; 56.873,117.048 57.65,117.825 v1@57.65,118.593 ; v1@57.536,118.453 cw(c57.26,118.177) 57.65,118.177 ; 57.65,118.138 cw(c58.095,118.138) v1@57.78,118.453
  Bottom Layer w0.8: CN1.7@41.306,109.22 43.755,109.22 R142.1@43.812,109.277 ; CN1.7@41.652,108.874 cw(c42.487,108.039) 42.487,109.22 cw(c42.487,110.401) CN1.7@41.652,109.566
TRST: CN1.3 R145.1 U38.90 | length 44.7
  Top Layer w0.254: CN1.3@41.306,104.14 41.346,104.1 43.8,104.1 50.44,110.74 U38.90@74.092,110.74 ; CN1.3@41.665,103.781 cw(c42.436,103.01) 42.436,104.1 ; CN1.3@41.665,104.499 ccw(c42.629,105.463) 42.629,104.1 ; CN1.3@41.845,103.601 cw(c43.049,102.397) 43.049,104.1 ; CN1.3@41.845,104.679 ccw(c43.242,106.076) 43.242,104.1
  Bottom Layer w0.8: CN1.3@41.306,104.14 R145.1@43.755,104.14 ; CN1.3@41.652,103.794 cw(c42.487,102.959) 42.487,104.14 cw(c42.487,105.321) CN1.3@41.652,104.486
TXD1: J3.3 U45.14 | length 10.1
  Top Layer w0.6: J3.3@45.67,73.203 49.302,76.835 U45.14@52.414,76.835 ; J3.3@45.67,73.69 ccw(c45.67,74.867) 46.502,74.035 ccw(c47.334,73.203) J3.3@46.157,73.203
USART1_RX: U38.69 U45.12 | length 89.5
  Top Layer w0.254: 54.5,83.775 54.15,84.125 51.638,84.125 48.616,87.147 48.616,98.298 53.243,102.925 v1(54.7,102.925) ; v1@54.578,102.803 ccw(c54.282,102.507) 54.282,102.925 ccw(c54.282,103.343) v1@54.578,103.047 ; v1@78.232,131.17 cw(c78.232,130.753) 78.527,131.048 cw(c78.823,131.343) v1@78.405,131.343 ; v1(78.232,131.343) 78.692,130.883 U38.69@78.692,119.34
  Top Layer w0.6: U45.12@52.414,79.375 54.225,79.375 54.5,79.65 54.5,83.775
  Bottom Layer w0.254: v1(54.7,102.925) 60.05,108.275 60.05,119.537 69.52,129.007 75.895,129.007 v1(78.232,131.343) ; v1@54.7,103.098 ccw(c54.7,103.516) 54.995,103.22 ccw(c55.291,102.925) v1@54.873,102.925 ; v1@78.059,131.343 cw(c77.641,131.343) 77.937,131.048 cw(c78.232,130.753) v1@78.232,131.17
USART1_TX: R149.1 U38.68 U45.11 | length 88.7
  Top Layer w0.254: 49.531,84.006 ccw(c50.168,84.642) R149.1@50.168,83.742 ; 49.757,83.78 cw(c49.44,83.463) R149.1@49.889,83.463 ; R149.1@50.168,83.369 48.082,85.455 48.082,98.806 53.451,104.175 v1(54.62,104.175) ; v1@54.497,104.053 ccw(c54.202,103.757) 54.202,104.175 ccw(c54.202,104.593) v1@54.497,104.297 ; v1(78.232,132.258) 78.892,132.258 79.192,131.958 U38.68@79.192,119.34 ; v1@78.354,132.135 cw(c78.65,131.84) 78.65,132.258 cw(c78.65,132.675) v1@78.354,132.38
  Top Layer w0.6: R149.1@50.168,83.369 50.168,81.107 50.63,80.645 U45.11@52.414,80.645
  Bottom Layer w0.254: v1(54.62,104.175) 59.425,108.98 59.425,119.648 69.342,129.565 75.286,129.565 v1@78.105,132.385 ; v1@54.62,104.348 ccw(c54.62,104.766) 54.915,104.47 ccw(c55.21,104.175) v1@54.793,104.175 ; 77.503,131.783 cw(c78.232,131.054) v1@78.232,132.085
VCC+3.8V: C37.1 D58.2 P37.4 | length 20.2
  Top Layer w1.5: C37.1@83.682,46.598 C37.1@83.82,46.736
  Top Layer w2: D58.2@79.936,41.656 79.936,45.211 81.461,46.736 C37.1@83.82,46.736 ; 87.219,48.144 ccw(c87.219,43.337) C37.1@83.82,46.736 ; P37.4@91.376,48.144 85.228,48.144 C37.1@83.82,46.736
VDDA: C7.2 C8.2 L1.2 L3.1 U38.22 | length 44
  Top Layer w0.254: U38.22@86.192,104.14 86.192,98.949 87.63,97.511 v1(87.63,97.358) ; 87.227,97.914 cw(c86.671,97.358) v1@87.457,97.358
  Bottom Layer w0.254: v1@87.63,97.388 99.837,97.388 100.375,96.85 100.375,96.057 L3.1@100.33,96.012 ; v1@87.752,97.236 cw(c88.118,96.87) 88.118,97.388 ; v1@87.752,97.481 ccw(c87.977,97.705) 87.977,97.388 ; 99.951,97.274 cw(c99.141,96.465) L3.1@100.211,96.057 ; 100.228,96.997 cw(c99.543,96.312) L3.1@100.449,95.967
  Bottom Layer w0.8: L3.1@100.33,96.012 102.363,96.012 103.56,94.815 C8.2@105.099,94.815 106.296,96.012 L1.2@107.442,96.012 ; L3.1@100.586,95.756 cw(c101.204,95.138) 101.204,96.012 cw(c101.204,96.886) L3.1@100.586,96.268 ; 102.548,95.827 cw(c101.535,94.815) C7.2@102.967,94.815 ; C8.2@104.868,94.584 cw(c107.442,92.009) L1.2@107.442,95.65 ; 105.723,95.439 cw(c106.674,94.488) L1.2@107.279,95.689 ; 106.233,95.949 cw(c107.442,94.741) L1.2@107.442,96.45 ; 106.505,96.221 cw(c107.198,95.528) L1.2@107.639,96.403 ; L1.2@107.186,95.756 ccw(c106.568,95.138) 106.568,96.012 ccw(c106.568,96.886) L1.2@107.186,96.268
VREF+: C9.2 C11.2 C13.1 L3.2 U38.21 | length 40.4
  Top Layer w0.254: U38.21@85.692,104.14 85.692,98.234 87.976,95.95 v1(88.375,95.95) ; 87.399,96.527 ccw(c88.375,97.504) v1@88.375,96.123 ; 87.832,96.094 ccw(c88.375,96.636) v1@88.375,95.869
  Bottom Layer w0.254: v1@88.497,95.828 cw(c88.793,95.532) 88.793,95.95 cw(c88.793,96.368) v1@88.497,96.072 ; 88.844,95.95 ccw(c88.844,96.711) C13.1@89.481,96.295 ; 88.926,95.95 cw(c88.926,95.167) C13.1@89.521,95.675 ; C13.1@89.268,96.434 cw(c88.375,97.016) v1(88.375,95.95) ; C13.1@89.328,95.51 ccw(c88.375,94.698) v1(88.375,95.95) ; C13.1@89.916,96.012 89.854,95.95 v1(88.375,95.95)
  Bottom Layer w0.8: C13.1@89.764,96.27 cw(c90.329,95.313) 91.115,96.099 ; C13.1@89.916,96.012 91.202,96.012 C11.2@92.399,94.815 C9.2@94.431,94.815 95.628,96.012 L3.2@96.774,96.012 ; C13.1@89.916,96.312 cw(c89.916,93.932) 91.599,95.615 ; C13.1@90.17,95.581 cw(c90.871,94.395) 91.845,95.369 ; C13.1@90.27,95.658 cw(c91.123,94.805) 91.123,96.012 cw(c91.123,97.219) C13.1@90.27,96.366 ; C9.2@94.2,94.584 cw(c96.774,92.009) L3.2@96.774,95.65 ; 95.055,95.439 cw(c96.006,94.488) L3.2@96.611,95.689 ; 95.565,95.949 cw(c96.774,94.741) L3.2@96.774,96.45 ; 95.837,96.221 cw(c96.53,95.528) L3.2@96.971,96.403 ; L3.2@96.518,95.756 ccw(c95.9,95.138) 95.9,96.012 ccw(c95.9,96.886) L3.2@96.518,96.268
VREF-: C9.1 C11.1 C13.2 L4.2 U38.20 | length 29
  Top Layer w0.254: U38.20@85.192,104.14 85.192,98.018 87.558,95.652 87.558,93.642 v1(88.475,92.725) ; v1@88.302,92.725 ccw(c87.884,92.725) 88.18,93.02 ccw(c88.475,93.316) v1@88.475,92.898
  Bottom Layer w0.254: v1@88.597,92.603 cw(c88.893,92.307) 88.893,92.725 cw(c88.893,93.143) v1@88.597,92.847 ; 88.894,92.725 ccw(c88.894,93.359) C13.2@89.456,93.066 ; C13.2@89.02,92.725 cw(c89.02,92.074) C13.2@89.518,92.493 ; C13.2@89.23,93.183 cw(c88.475,93.577) v1(88.475,92.725) ; C13.2@89.324,92.329 ccw(c88.475,91.617) v1(88.475,92.725) ; C13.2@89.916,92.826 89.815,92.725 v1(88.475,92.725)
  Bottom Layer w0.8: C13.2@89.916,92.826 C11.1@92.137,92.826 ; C13.2@90.27,92.473 cw(c91.123,91.619) 91.123,92.826 cw(c91.123,94.033) C13.2@90.27,93.18 ; 91.658,92.826 ccw(c91.658,93.735) C11.1@92.301,93.092 ; C11.1@92.399,93.088 C9.1@94.431,93.088 96.65,93.088 L4.2@96.774,92.964 ; 95.601,93.088 cw(c95.601,91.791) L4.2@96.518,92.708
VS+: J1.1 J8.1 J8.2 P40.1 P40.2 | length 85.6
  Top Layer w1.5: J8.2@183.152,51.192 J8.1@183.152,48.652 183.152,44.461 184.384,43.229 184.384,43.167 185.167,42.384 185.229,42.384 J1.1@187.481,40.132 ; J1.1@186.707,40.132 ccw(c184.838,40.132) 186.16,41.453 ccw(c187.481,42.775) J1.1@187.481,40.906
  Bottom Layer w1.5: J8.1@183.152,48.652 183.152,44.461 184.384,43.229 184.384,43.167 185.167,42.384 185.229,42.384 J1.1@187.481,40.132 ; J1.1@186.707,40.132 ccw(c184.838,40.132) 186.16,41.453 ccw(c187.481,42.775) J1.1@187.481,40.906
  Bottom Layer w2.8: 174.55,82.349 180.185,87.984 ; 178.825,52.979 J8.1@183.152,48.652 J8.2@183.152,51.192 ; 180.095,51.709 ccw(c182.93,54.544) J8.2@183.195,50.543 ; 180.152,87.952 cw(c181.8,86.304) 181.8,88.634 ccw(c181.8,86.304) 180.152,87.952
  Bottom Layer w3: 174.55,82.349 174.55,78.875 178.825,74.6 178.825,52.979 ; 180.185,87.984 P40.1@181.8,87.984
VS-: J1.2 J8.5 J8.6 P40.5 P40.6 P42.3 | length 186.1
  Top Layer w1.5: 176.863,45.163 ccw(c174.601,47.425) v5@177.8,47.425 ; 177.85,46.15 175.1,43.4 175.1,37.95 177.325,35.725 190.2,35.725 192.561,38.086 J1.2@192.561,40.132 ; J8.6@183.152,61.077 J8.6@183.152,61.352 ; 191.223,36.748 ccw(c189.211,38.76) J1.2@191.845,39.839 ; J1.2@192.014,39.585 cw(c190.692,38.263) 192.561,38.263 cw(c194.429,38.263) J1.2@193.108,39.585 ; 192.818,38.343 ccw(c191.473,39.687) J1.2@193.233,40.407
  Top Layer w2.8: 181.1,65.25 183.152,63.198 J8.6@183.152,61.352 J8.5@183.152,58.812
  Top Layer w3: P40.6@169.1,87.984 P40.5@171.64,87.984 171.64,81.585 181.1,72.125 181.1,65.25 ; 177.85,46.15 177.85,55.775 182.02,59.945 ; 180.566,58.491 cw(c183.152,55.904) 183.152,59.562
  Bottom Layer w1.5: P42.3@144.272,115.316 148.75,110.838 148.75,98.15 158.916,87.984 P40.6@169.1,87.984 P40.5@171.64,87.984 ; 176.863,45.163 ccw(c174.601,47.425) v5@177.8,47.425 ; v5(177.95,47.425) 177.95,46.25 175.1,43.4 175.1,37.95 177.325,35.725 190.2,35.725 192.561,38.086 J1.2@192.561,40.132 ; 191.223,36.748 ccw(c189.211,38.76) J1.2@191.845,39.839 ; J1.2@192.014,39.585 cw(c190.692,38.263) 192.561,38.263 cw(c194.429,38.263) J1.2@193.108,39.585 ; 192.818,38.343 ccw(c191.473,39.687) J1.2@193.233,40.407
VSSA: C7.1 C8.1 L2.2 L4.1 U38.19 | length 39.6
  Top Layer w0.254: U38.19@84.692,104.14 84.692,97.604 86.893,95.402 86.893,92.757 v1(88.275,91.375) ; v1@88.102,91.375 ccw(c87.684,91.375) 87.98,91.67 ccw(c88.275,91.966) v1@88.275,91.548
  Bottom Layer w0.254: v1(88.275,91.375) 99.7,91.375 100.33,92.005 ; v1@88.397,91.253 cw(c88.693,90.957) 88.693,91.375 cw(c88.693,91.793) v1@88.397,91.497 ; L4.1@100.082,92.379 cw(c99.923,92.005) 100.33,92.005 ; L4.1@100.33,92.964 100.33,92.005 ; L4.1@100.578,92.379 ccw(c100.737,92.005) 100.33,92.005
  Bottom Layer w0.8: L4.1@100.33,92.964 L2.2@107.442,92.964 ; L4.1@100.586,92.708 cw(c101.204,92.09) 101.204,92.964 cw(c101.204,93.838) L4.1@100.586,93.22 ; L2.2@107.186,92.708 ccw(c106.568,92.09) 106.568,92.964 ccw(c106.568,93.838) L2.2@107.186,93.22
WIFI_RX: P38.3 U38.55 | length 149.6
  Top Layer w0.254: v1@57.953,104.678 cw(c57.657,104.382) 58.075,104.382 cw(c58.493,104.382) v1@58.197,104.678 ; v1(58.075,104.8) 58.075,100.264 59.748,98.592 59.748,94.652 73.075,81.325 73.075,64.275 79,58.35 85.7,58.35 89.525,62.175 94.025,62.175 95.125,61.075 95.125,51.125 96.582,49.668 ; v1@85.115,130.561 cw(c85.115,130.143) 85.411,130.438 cw(c85.706,130.734) v1@85.288,130.734 ; v1(85.115,130.734) 85.692,130.157 U38.55@85.692,119.34 ; P38.3@97.643,49.228 ccw(c96.582,48.169) 96.582,49.668 ; P38.3@97.643,50.108 cw(c96.582,51.167) 96.582,49.668 ; P38.3@97.823,49.407 ccw(c97.194,48.78) 97.194,49.668 ccw(c97.194,50.556) P38.3@97.823,49.929 ; P38.3@98.084,49.668 96.582,49.668
  Bottom Layer w0.254: v1@57.953,104.922 ccw(c57.657,105.218) 58.075,105.218 ccw(c58.493,105.218) v1@58.197,104.922 ; v1@58.075,104.825 58.075,105.243 60.725,107.893 60.725,119.45 69.723,128.448 76.378,128.448 78.664,130.734 v1(85.115,130.734) ; v1@84.993,130.611 ccw(c84.698,130.316) 84.698,130.734 ccw(c84.698,131.151) v1@84.993,130.856
WIFI_TX: P38.4 U38.56 | length 136
  Top Layer w0.254: v1@58.953,105.078 cw(c58.657,104.782) 59.075,104.782 cw(c59.493,104.782) v1@59.197,105.078 ; v1(59.075,105.2) 59.075,103.475 58.675,103.075 58.675,100.575 60.375,98.875 60.375,94.8 73.75,81.425 73.75,70.075 79.025,64.8 92.475,64.8 96,61.275 96,53.125 96.917,52.208 ; v1@84.607,129.9 cw(c84.607,129.483) 84.903,129.778 cw(c85.198,130.073) v1@84.78,130.073 ; v1(84.607,130.073) 85.192,129.489 U38.56@85.192,119.34 ; P38.4@97.566,51.861 ccw(c96.917,51.427) 96.917,52.208 ; P38.4@97.566,52.555 cw(c96.917,52.989) 96.917,52.208 ; P38.4@98.084,52.208 96.917,52.208
  Bottom Layer w0.254: v1@59.074,105.201 61.325,107.451 61.325,119.389 69.85,127.914 76.835,127.914 78.969,130.048 v1@84.607,130.048 ; v1@59.075,105.373 ccw(c59.075,105.787) 59.368,105.494 ; v1@59.248,105.2 cw(c59.669,105.2) 59.371,105.498 ; 84.128,130.048 ccw(c84.128,130.552) v1@84.485,130.196 ; 84.251,130.048 cw(c84.251,129.717) v1@84.485,129.951
WORK: P36.9 U38.66 | length 120.9
  Top Layer w0.254: P36.9@50.736,48.144 50.78,48.1 51.65,48.1 ; P36.9@51.299,47.878 cw(c51.65,47.712) 51.65,48.1 ; P36.9@51.329,48.334 ccw(c51.65,48.437) 51.65,48.1 ; v1@53.929,96.571 cw(c53.511,96.571) 53.807,96.275 cw(c54.102,95.98) v1@54.102,96.398 ; v1(54.102,96.571) 53.086,95.555 53.086,89.916 55.194,87.808 60.782,87.808 68.885,79.705 68.885,68.986 55.892,55.994 55.892,52.342 51.65,48.1 ; v1@79.913,122.712 cw(c79.24,122.039) 80.192,122.039 ; v1(80.035,122.834) 80.035,122.885 80.192,122.729 U38.66@80.192,119.34
  Bottom Layer w0.254: v1(54.102,96.571) 54.483,96.19 56.261,96.19 56.947,96.876 64.135,96.876 68.7,101.441 68.7,118.89 72.466,122.657 79.807,122.657 80.035,122.885 v1(80.035,122.834) ; 79.188,122.657 ccw(c79.188,123.681) v1@79.913,122.957
WPS: P39.5 U38.41 | length 104.8
  Top Layer w0.254: U38.41@89.292,113.24 99.289,113.24 101.822,115.773 125.705,115.773 127.756,113.722 127.756,103.74 137.437,94.059 137.641,94.059 v1(137.65,94.05) ; v1@135.675,91.952 cw(c135.675,91.534) 135.97,91.83 cw(c136.266,92.125) v1@135.848,92.125 ; v1(135.675,92.125) 137.16,90.64 137.16,88.306 143.764,81.702 143.764,68.424 P39.5@140.756,65.416 ; 137.006,94.49 ccw(c137.65,95.134) v1@137.65,94.223 ; P39.5@140.756,65.785 ccw(c140.756,66.676) 141.386,66.046 ccw(c142.016,65.416) P39.5@141.125,65.416 ; P39.5@140.756,66.039 ccw(c140.756,67.543) 141.82,66.48 ccw(c142.883,65.416) P39.5@141.379,65.416
  Bottom Layer w0.254: v1(135.675,92.125) 135.725,92.125 v1(137.65,94.05) ; v1@135.675,92.298 ccw(c135.675,92.836) 136.056,92.456 ; v1@135.848,92.125 cw(c136.145,92.125) 135.935,92.335 ; v1@137.477,94.05 cw(c137.059,94.05) 137.355,93.755 cw(c137.65,93.459) v1@137.65,93.877
pads on no net: BT1.0 CN1.17 Designator19.0 Designator19.2 Designator19.3 Designator19.4 Designator19.5 Designator19.6 Designator19.7 Designator19.8 Designator19.9 Designator20.0 Designator20.2 Designator20.3 Designator20.4 Designator20.5 Designator20.6 Designator20.7 Designator20.8 Designator20.9 Designator21.0 Designator21.2 Designator21.3 Designator21.4 Designator21.5 Designator21.6 Designator21.7 Designator21.8 Designator21.9 Designator23.0 Designator23.2 Designator23.3 Designator23.4 Designator23.5 Designator23.6 Designator23.7 Designator23.8 Designator23.9 Designator24.0 Designator24.2 Designator24.3 Designator24.4 Designator24.5 Designator24.6 Designator24.7 Designator24.8 Designator24.9 Designator25.0 Designator25.2 Designator25.3 Designator25.4 Designator25.5 Designator25.6 Designator25.7 Designator25.8 Designator25.9 Designator26.0 Designator26.2 Designator26.3 Designator26.4 Designator26.5 Designator26.6 Designator26.7 Designator26.8 Designator26.9 Designator27.0 Designator27.2 Designator27.3 Designator27.4 Designator27.5 Designator27.6 Designator27.7 Designator27.8 Designator27.9 DZ1.3 J2.8 J2.9 J2.11 J3.1 J3.4 J3.6 J3.7 J3.8 J3.9 J3.10 J3.11 J7.3 J8.3 J8.4 P36.4 P36.5 P36.8 P37.5 P37.8 P37.9 P37.10 P37.11 P39.3 P39.4 P39.6 P40.3 P40.4 U38.5 U38.6 U38.7 U38.45 U38.46 U38.51 U38.67 U38.73 U38.80 U38.97 U38.98 U42.5 U43.5 U45.7 U45.8 U45.9 U45.10 U50.1 U50.2 U50.3 Y3.
copper on no net: | length 32.3
  Top Layer w0.254: 72.856,106.74 74.092,106.74 ; 74.092,107.24 75.439,107.24
  Top Layer w1.3: 90.6,63.425 90.641,63.384 91.376,63.384 ; 92.171,58.304 92.25,58.225
  Top Layer w1.5: 91.376,58.304 92.171,58.304 ; 91.376,60.844 92.144,60.844 92.15,60.85 ; 91.376,65.924 91.376,66.776 91.425,66.825 ; 139.039,59.764 cw(c140.47,58.332) 140.756,60.336 139.611,60.336 139.55,60.275 ; 139.099,62.324 cw(c140.48,60.942) 140.756,62.876 139.651,62.876 139.6,62.825 ; 139.5,68.075 139.619,67.956 140.756,67.956 ; 145.575,69 145.603,68.972 146.834,68.972 ; 181.678,53.203 cw(c182.976,51.904) 183.152,53.732 ; 181.735,53.26 cw(c182.916,52.078) 183.152,53.732 ; 182.15,53.675 182.207,53.732 183.152,53.732 ; 182.9,56.125 183.005,56.125 183.152,56.272
  Top Layer w2: 41.3,122.031 cw(c41.446,119.213) 43.442,121.208 ; 41.306,121.92 42.73,121.92 42.75,121.9 ; 42.15,71.9 42.244,71.806 43.13,71.806 ; 42.2,69.2 42.363,69.037 43.13,69.037 ; 42.25,77.325 42.268,77.343 43.13,77.343 ; 42.425,74.65 42.501,74.574 43.13,74.574 ; 45.625,79.325 45.67,79.28 45.67,78.74 ; 45.67,70.434 45.712,70.434 46.551,71.274 ; 90.875,50.675 90.884,50.684 91.376,50.684
  Bottom Layer w0.6: 150,131.2 150.027,131.227 151.783,131.227 ; 150.05,141.95 150.079,141.979 151.588,141.979
  other v6: 160.232,97.434
  other v7: 160.272,118.466

## Polygon pours and split planes (outlines as drawn)
GND on Top Layer "Top Layer-No Net" (hatched 90Degree grid 0 track 0.203, remove dead copper, pour order 1000): 35,145.8 35,35 172.2,35 172.225,35.025 172.225,75.425 165.15,82.5 165.125,82.525 165.125,83.725 165.125,91.775 175.125,91.775 184.975,91.775 185,91.75 185,135.8 185,145.8
GND on Bottom Layer "Top Layer-No Net" (hatched 90Degree grid 0 track 0.203, remove dead copper, pour order 1001): 35,145.8 35,35 172.225,35 172.225,36.9 172.225,75.425 165.125,82.525 165.125,83.375 165.125,91.775 166.375,91.775 185,91.775 185,94.25 185,114.85 185,135.8 185,145.8

## Keep-outs
Keep-Out Layer:
  lines w0.254: 29,68.55 29,127.075 29.225,127.3 ; 31.492,34.524 32,33 ; 31.492,146.276 32,147.8 ; 31.746,33 32.254,33 ; 31.746,147.8 32.254,147.8 ; 32,83.392 32,33 ; 32,97.408 32,147.8 ; 32.508,34.524 32,33 ; 32.508,146.276 32,147.8 ; 35,152.746 35,153.254 ; 36.524,152.492 35,153 ; 36.524,153.508 35,153 ; 109.261,153 35,153 ; 120.739,153 195,153 ; 193,147.8 cw(c193,145.8) 195,145.8 195,139.8 cw(c193,139.8) 193,137.8 187,137.8 ccw(c187,135.8) 185,135.8 185,45 ccw(c187,45) 187,43 193,43 cw(c193,41) 195,41 195,35 cw(c193,35) 193,33 37,33 cw(c37,35) 35,35 35,145.8 cw(c37,145.8) 37,147.8 193,147.8 ; 193.476,152.492 195,153 ; 193.476,153.508 195,153 ; 195,152.746 195,153.254
  text "160 (mm)" at 109.515,152.086 h1.52
  text "114.8 (mm)" at 32.914,83.646 h1.52 r90

## Silkscreen, mask and mechanical layers (free items; w line width, h text height)
Top Overlay:
  lines w0.254: 35,35 195,35 ; 35,145.8 195,145.8 ; 172.225,35 172.225,75.428 171.575,76.078 171.572,76.078 169.15,78.5 168.925,78.725 165.125,82.525 165.125,91.775 185,91.775 ; 195,35 195,35 ; 195,145.8 195,145.8
  text "2" at 121.7,147.35 h1 r180
  text "3" at 124.325,147.35 h1 r180
  text "4" at 126.95,147.35 h1 r180
  text "1" at 119.2,147.325 h1 r180
  text "CAN2L" at 176.025,135.05 h1.52
  text "SW4" at 127.35,133.35 h1 r90
  text "SW3" at 124.7,133.3 h1 r90
  text "SW2" at 122.25,133.2 h1 r90
  text "SW1" at 119.525,133.175 h1 r90
  text "CAN2H" at 175.8,131.325 h1.52
  text "CAN1L" at 175.825,127.7 h1.52
  text "CAN1H" at 175.7,123.65 h1.52
  text "RUYI SYSTEM V3.0" at 159,104.125 h1.52
  text "GND" at 174.3,72.225 h1.52 r90
  text "VI" at 174.35,68.6 h1.52 r90
  text "+5" at 174.4,64.9 h1.52 r90
  text "PT-1" at 172.825,60 h1.52
  text "PT-2" at 172.875,56.225 h1.52
  text "GND" at 174.5,50.825 h1.52 r90
  text "RESET" at 36.675,44.675 h1.52 r270
  text "24+" at 184.15,42.95 h1.52 r90
  text "24-" at 190.475,36.8 h1.52
  text "GND" at 167.175,36.5 h1
  text "GND" at 146.075,36.4 h1
  text "AD7" at 149.8,36.4 h1
  text "GND" at 137.05,36.325 h1
  text "GND" at 154.35,36.275 h1
  text "AD8" at 158.625,36.275 h1
  text "GND" at 127.475,36.225 h1
  text "AD6" at 141.175,36.2 h1
  text "AD5" at 132.175,36.15 h1
  text "4-20mA" at 161.95,35.325 h1
  text "+" at 186.625,33.3 h1.52
  text "-" at 192.35,33.25 h1.52